# EAGLE board Servo_Word_Clock_LED_board_u_v1 (EAGLE 9.4.2)
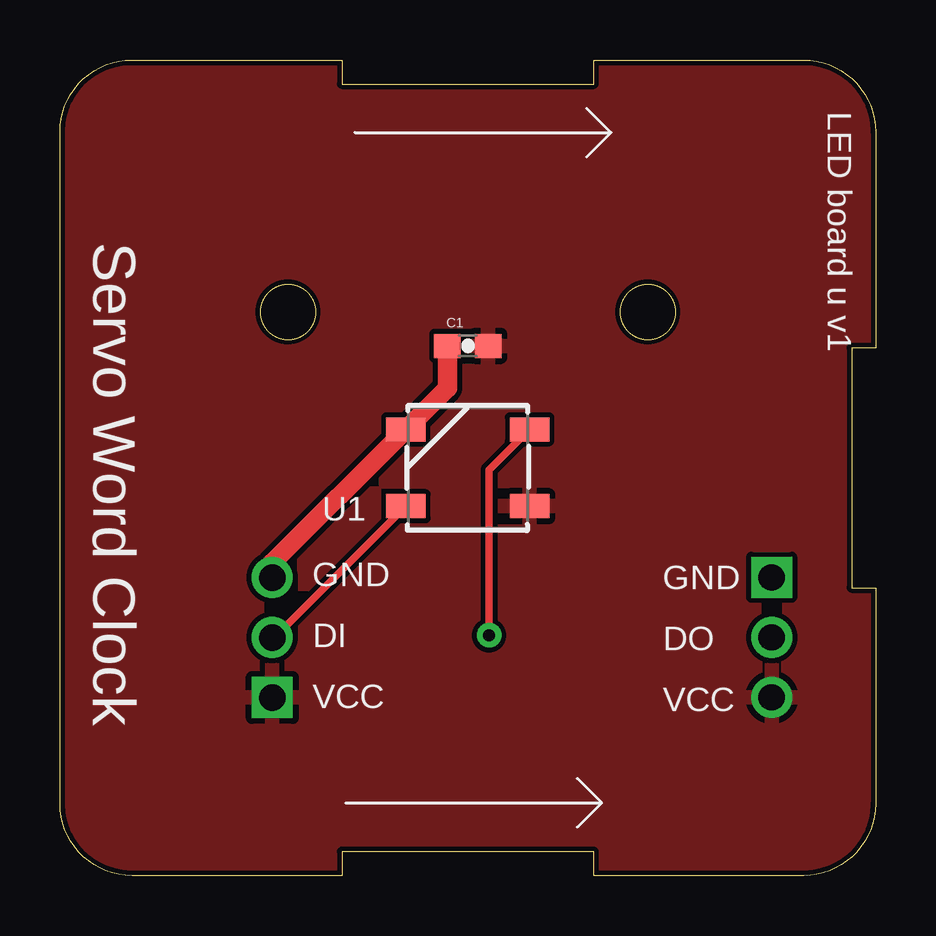
[diagram p0: board, top side]
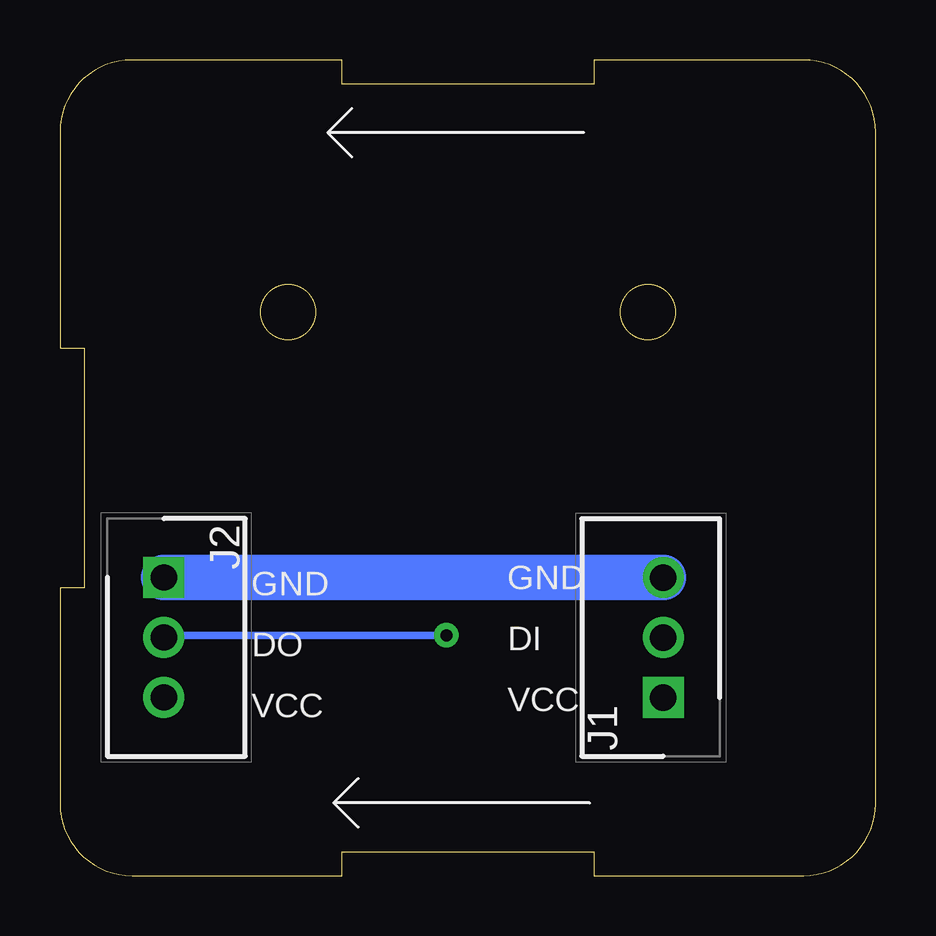
[diagram p1: board, bottom side, seen from below]

Size 34 x 34 mm. Coordinates in mm from the lower left corner, seen from the top.
Outline: 33,22 33,12 34,12 34,3 arc-90 31,0 22.25,0 22.25,1 11.75,1 11.75,0 3,0 arc-90 0,3 0,31 arc-90 3,34 11.75,34 11.75,33 22.25,33 22.25,34 31,34 arc-90 34,31 34,22 33,22
Outline: circle at 9.5,23.5 radius 1.15
Outline: circle at 24.5,23.5 radius 1.15
Outline: circle at 9.5,23.5 radius 1.15
Copper layers (1*16): Top 0.035mm / dielectric 1.5mm / Bottom 0.035mm
Design rules "SparkFun": minimum track width 8mil, minimum drill 20mil, track to track 8mil, track to pad 8mil, pad to pad 8mil, via to via 8mil, smd to smd 8mil, copper to edge 8mil, drill to drill 8mil, minimum pad ring 12mil, minimum via ring 10mil, stop-mask expansion 4mil, vias tented up to drill 20mil, thermal gap 10mil

## Footprints (pad centres in the part's own frame; a part is rotated, then mirrored left to right if it is on the bottom)
0603-CAP = smd 1.1 x 1: 1 -0.85,0; 2 0.85,0
SHDR3W64P0X250_1X3_990X575X700 = drill 1.1 pad 1.65 square: 1 0,0 | drill 1.1 pad 1.65: 2 2.5,0; 3 5,0
WS2812B = smd 1.651 x 1: 1 -2.577,1.6; 2 -2.577,-1.6; 3 2.577,-1.6; 4 2.577,1.6

## Placement (x,y rotation side)
C1  0.1uF  [0603-CAP]  17,22.08 0 top
J1  B3B-XH-A(LF)(SN)  [SHDR3W64P0X250_1X3_990X575X700]  8.85,7.42 90 bottom
J2  B3B-XH-A(LF)(SN)  [SHDR3W64P0X250_1X3_990X575X700]  29.67,12.43 270 bottom
U1  WS2812B  [WS2812B]  17,17 180 top

## Library data of the parts
C1 = SparkFun-Capacitors; PROD_ID: CAP-00810
J1 J2 = SamacSys_Parts; DESCRIPTION: XH-2.5mm Header top entry 3 way JST XH Series, Series Number B3B, 2.5mm Pitch 3 Way 1 Row Straight PCB Header, Solder Termination, 3A; HEIGHT: 7mm; MANUFACTURER_NAME: JST (JAPAN SOLDERLESS TERMINALS); MANUFACTURER_PART_NUMBER: B3B-XH-A(LF)(SN); RS_PART_NUMBER: 8201557P; RS_PRICE-STOCK: http://uk.rs-online.com/web/p/products/8201557P
U1 = SparkFun-LED; PROD_ID: DIO-12503

## Nets
DI: J1.2 U1.4
DO: J2.2 U1.2
GND: C1.1 J1.3 J2.1 U1.3
VCC: C1.2 J1.1 J2.3 U1.1

## Tracks (layer width: path | path; a pad name or v marks a point on that pad's centre or on a via)
DI
  Top 0.305: U1.4 8.95,9.92 J1.2
DO  (via drill 0.51)
  Top 0.305: U1.2 17.89,16.91 v17.89,10.02
  Bottom 0.305: v17.89,10.02 29.59,10.02 J2.2
GND
  Top 0.813: C1.1 16.15,20.33 U1.3 8.85,13.02 J1.3
  Bottom 1.905: J1.3 J2.1
VCC
  pour Top: -1.03,34.91 -1.03,-0.78 34.4,-0.78 34.4,35.43

## Text on the board
tPlace: LED board u v1 | Servo Word Clock | GND / DI / VCC | GND / DO / VCC
bPlace: GND / DI / VCC | GND / DO / VCC